# Altium PCB UVB LED Array.PcbDoc
Units mm, origin at the board's own origin, x right, y up, seen from the top; angles counter-clockwise.
Board outline 200 x 120 mm, 2 copper layers (Top Layer, Bottom Layer), stack 1.571 mm thick; 154 components, 153 nets, 494 pads, 0 vias.
Unrouted connection lines stored in the file: 155.
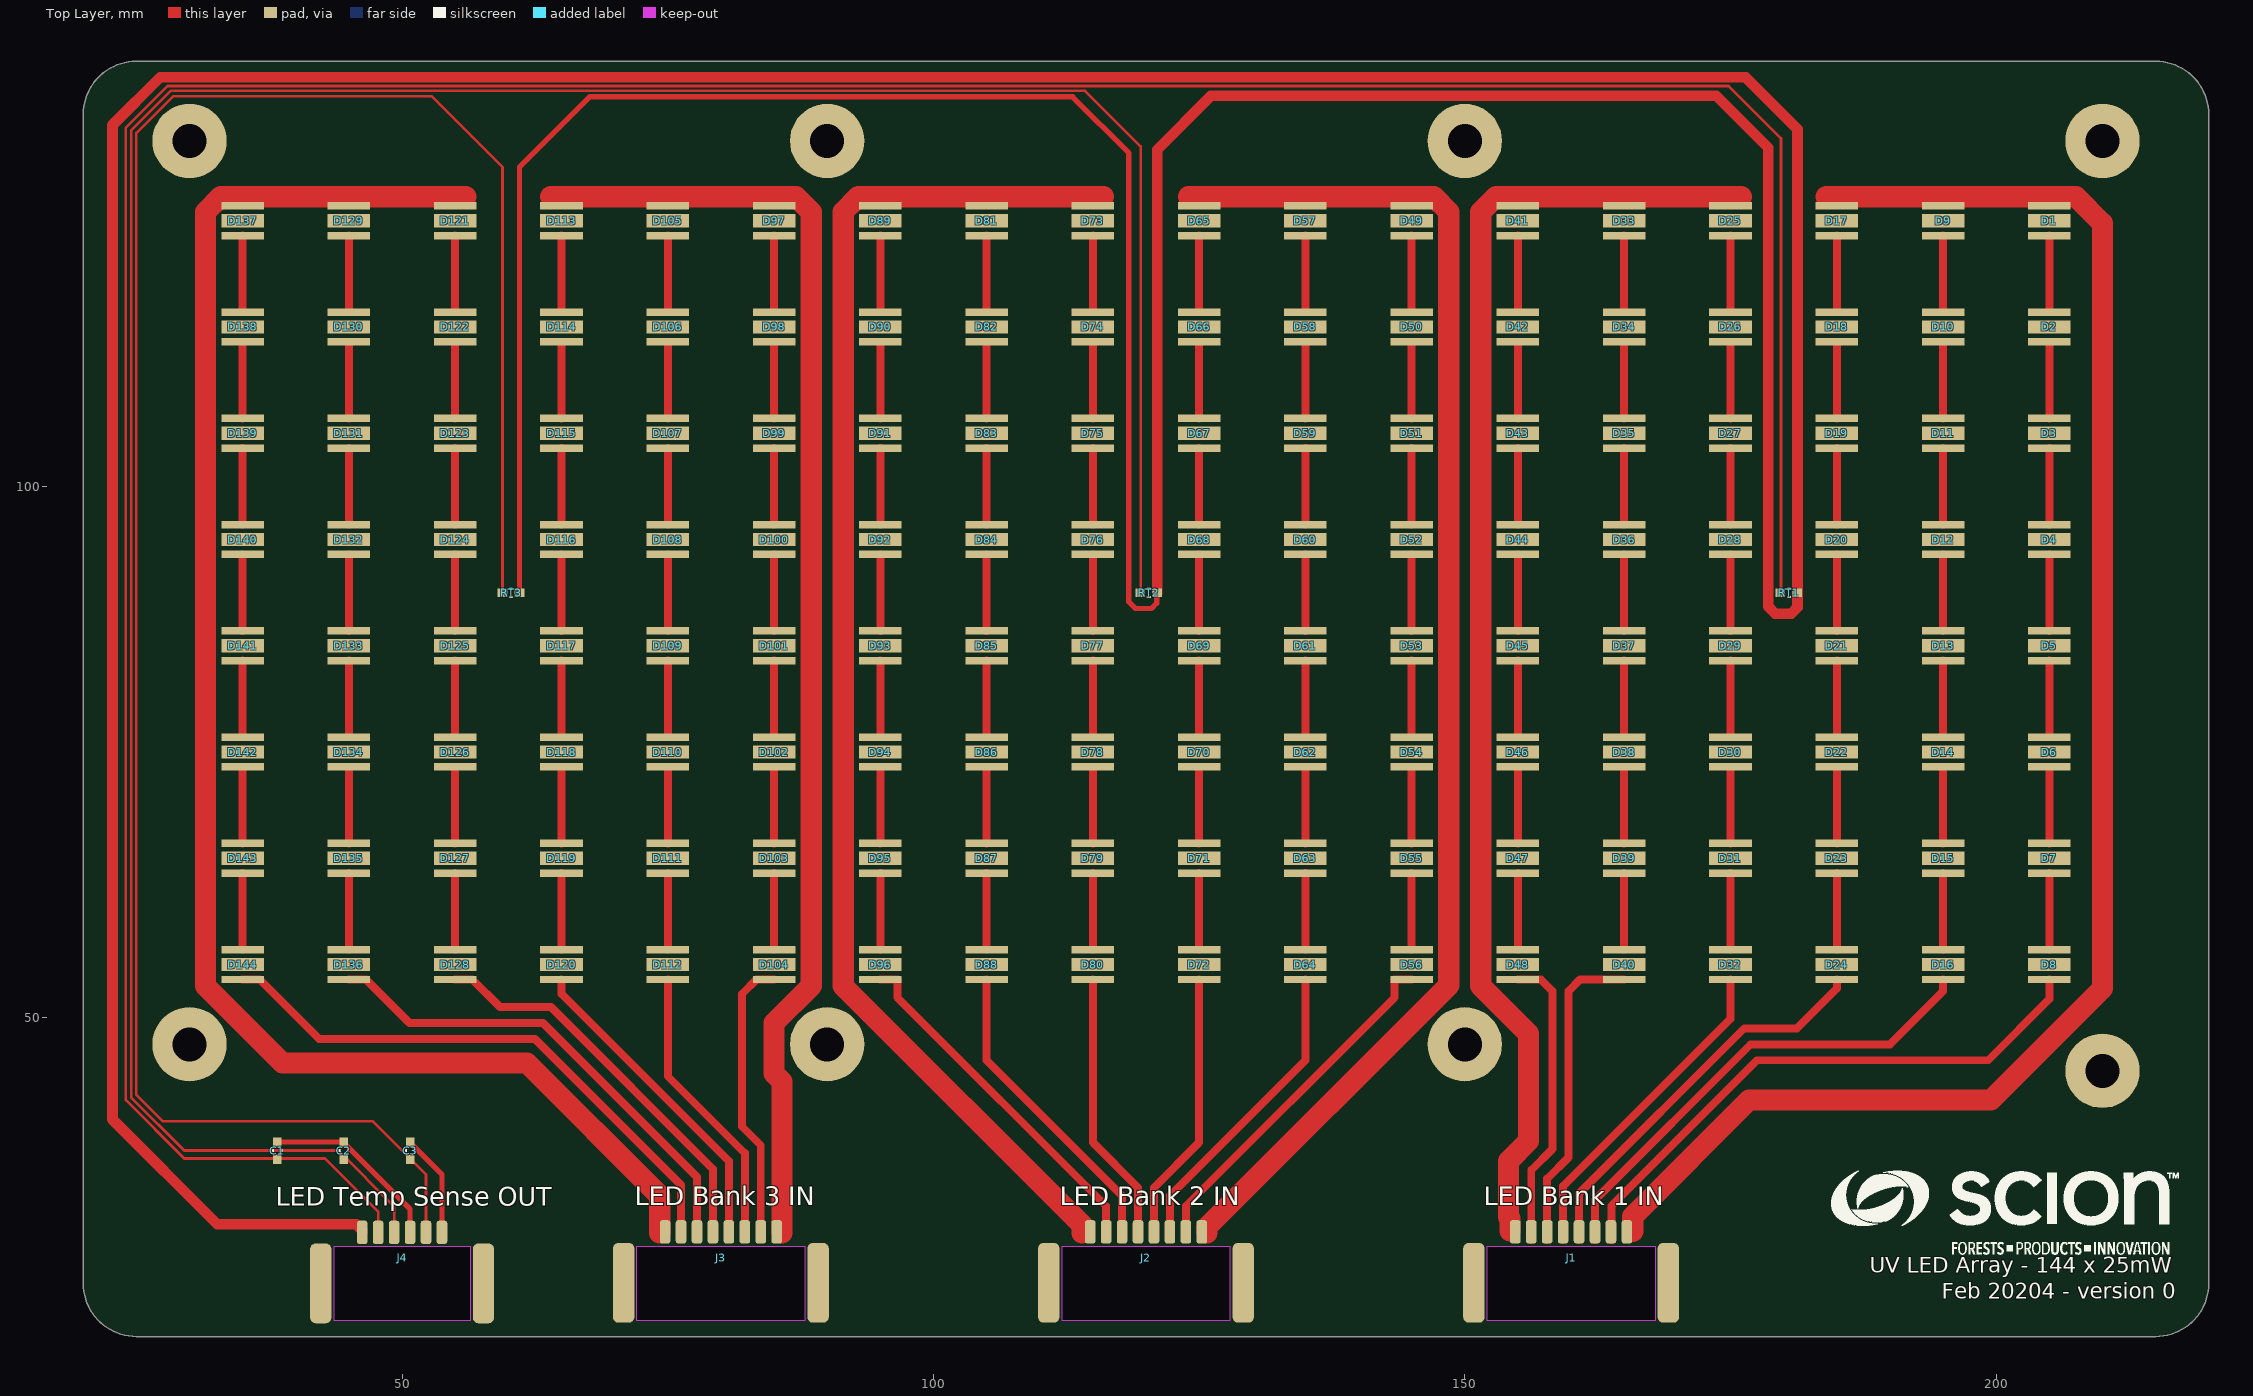
[diagram p0: Top Layer view]
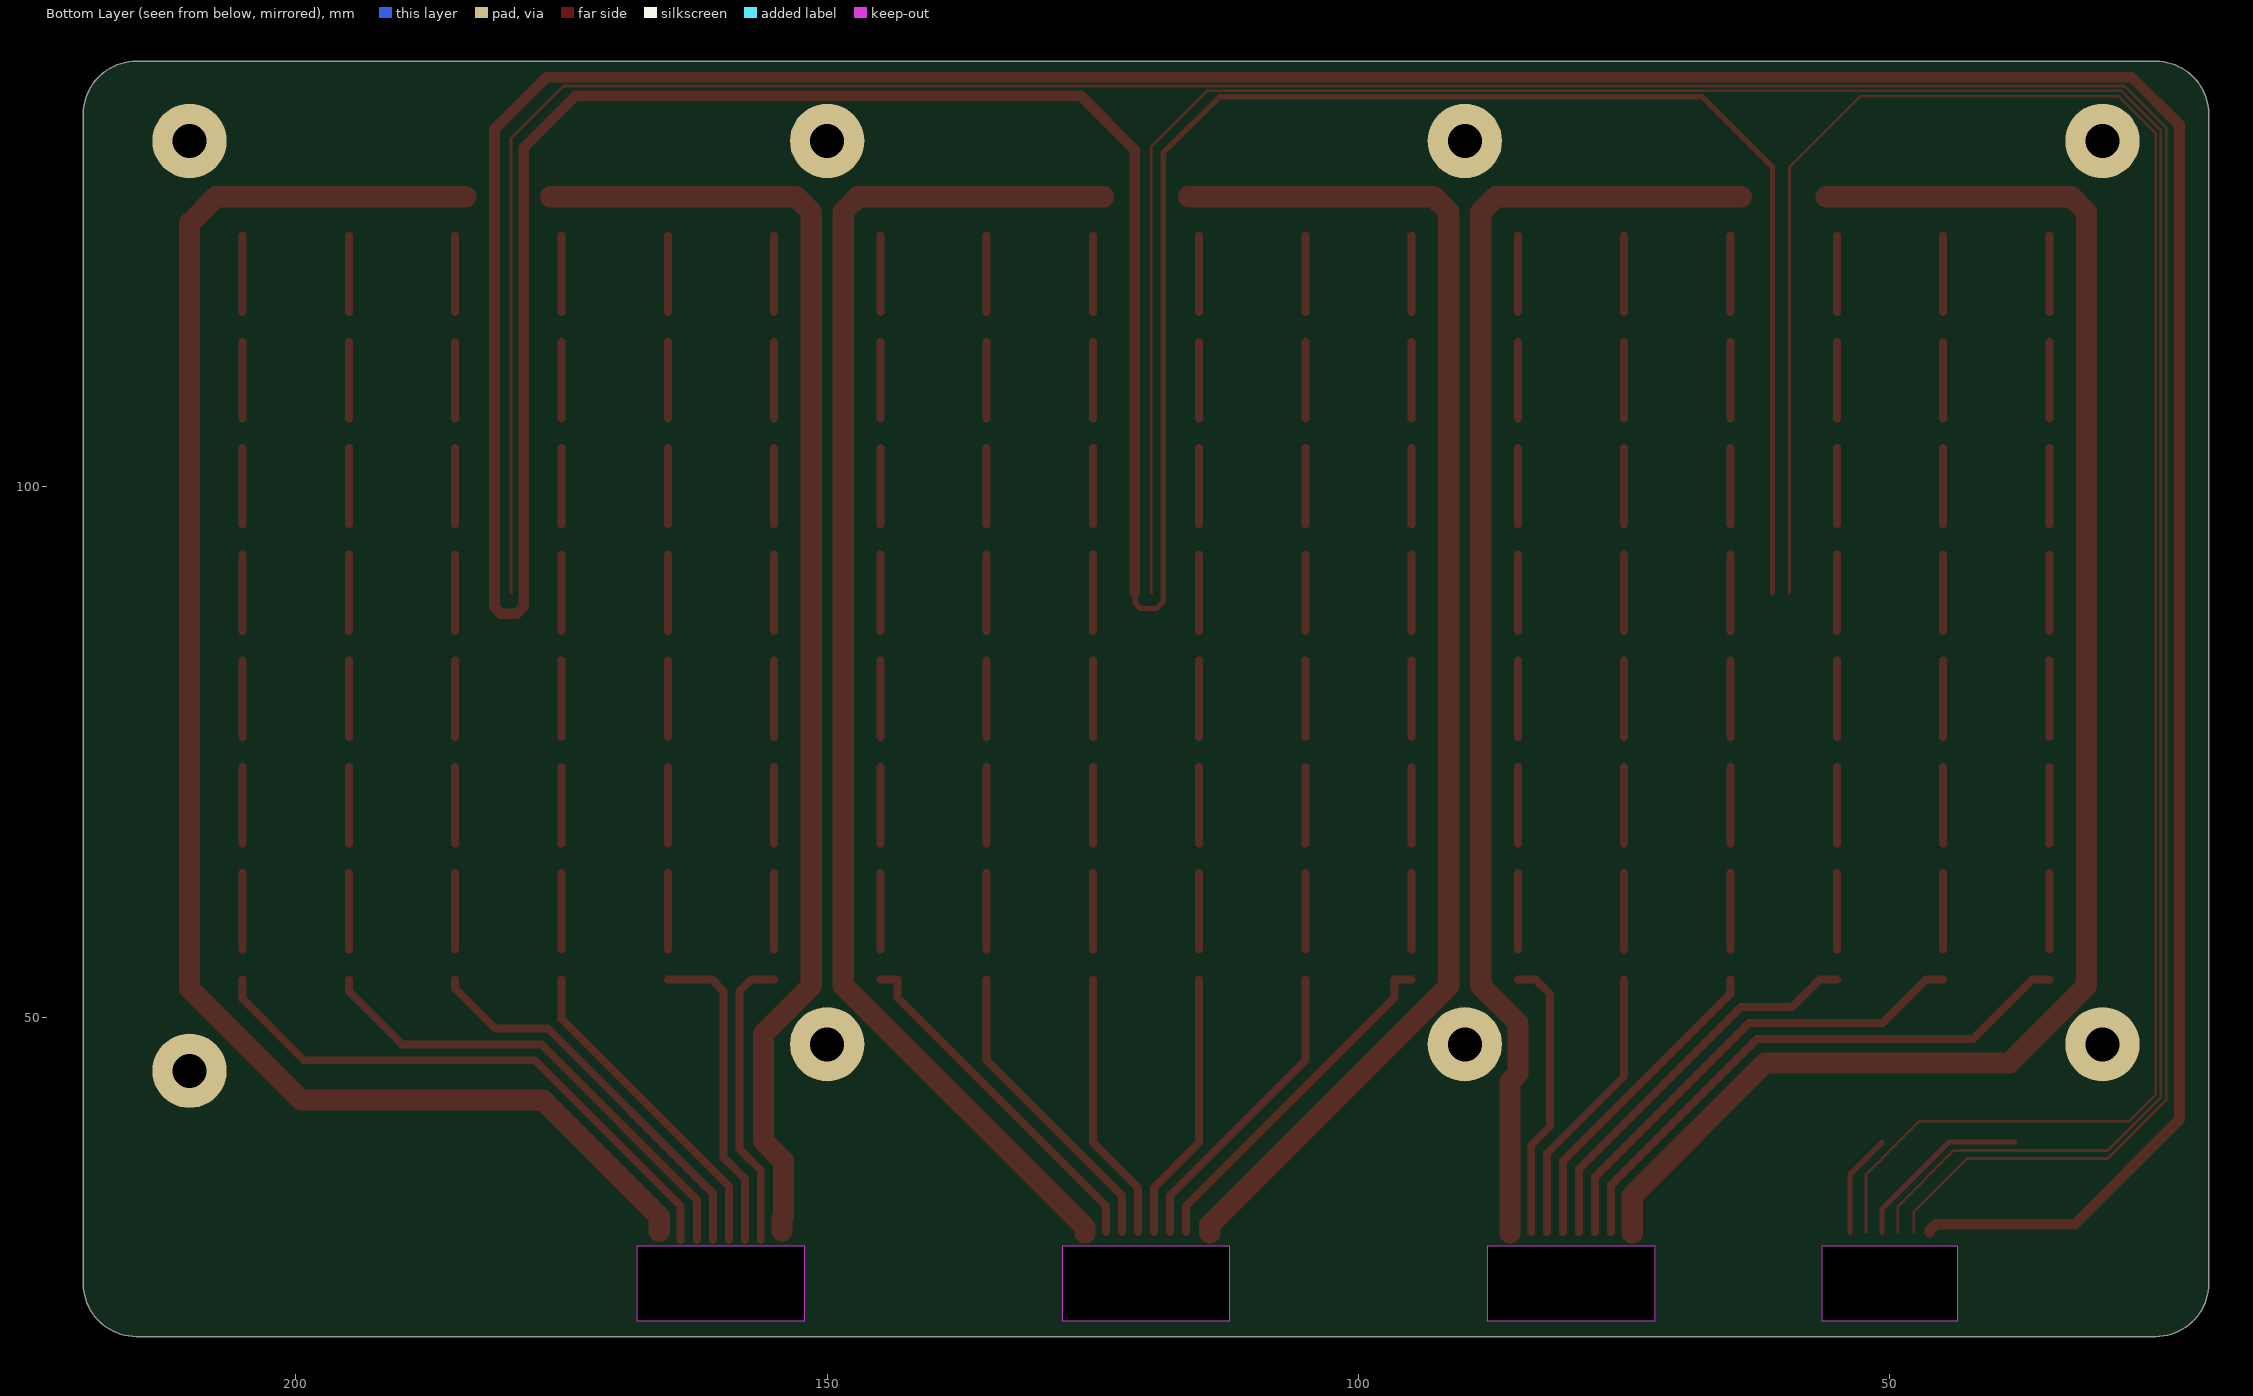
[diagram p1: Bottom Layer view, seen from below]
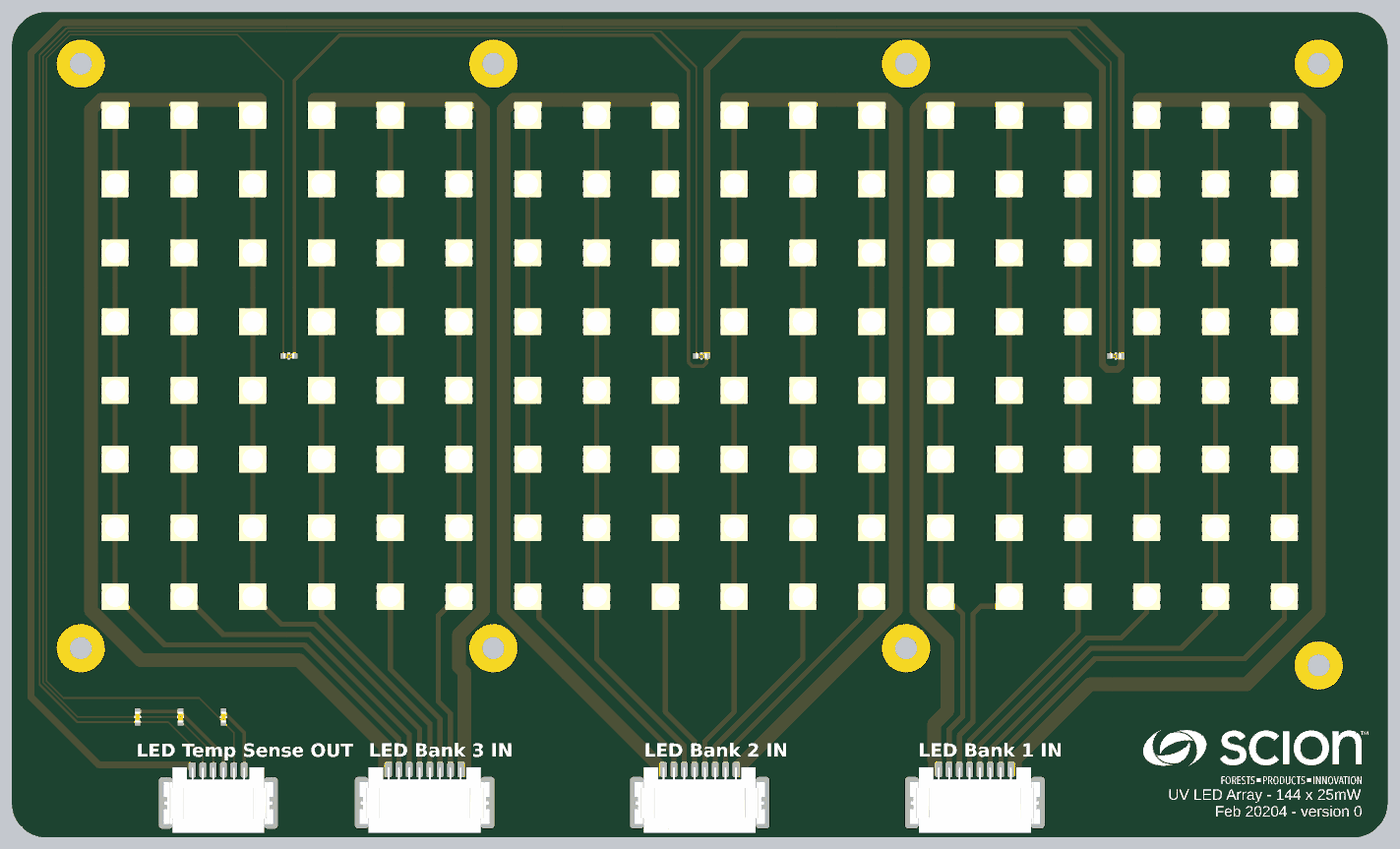
[diagram p2: 3D render of the assembled board from above, using the file's embedded part models]

## Layer stack, top to bottom
Top Solder: solder mask 0.0102, Solder Resist, Dk 3.5
Top Layer: signal copper 0.0356
Dielectric 1: dielectric 1.5, FR-4, Dk 4.8
Bottom Layer: signal copper 0.0356
Bottom Solder: solder mask 0.0102, Solder Resist, Dk 3.5

## Board outline
220,135 ccw(c215,135) 215,140 25,140 ccw(c25,135) 20,135 20,25 ccw(c25,25) 25,20 215,20 ccw(c215,25) 220,25
cut-out: 152.1,28.5 167.9,28.5 167.9,21.5 152.1,21.5
cut-out: 112.1,28.5 127.9,28.5 127.9,21.5 112.1,21.5
cut-out: 72.1,28.5 87.9,28.5 87.9,21.5 72.1,21.5
cut-out: 43.6,28.5 56.4,28.5 56.4,21.5 43.6,21.5

## Design rules (kind name [scope] priority, off if disabled: settings)
Clearance [All] p1: gap=0.2 ignorepadtopadclearanceinfootprint=FALSE
PolygonConnect "No relief connect" [All vs IsNamedPolygon('GND_L01_P000')] p1: connectstyle=Direct reliefconductorwidth=0 reliefentries=4 polygonreliefangle="90 Angle" airgapwidth=0
PolygonConnect [All] p2: connectstyle=Relief reliefconductorwidth=0.254 reliefentries=4 polygonreliefangle="90 Angle" airgapwidth=0.254
RoutingVias [All] p1: holewidth=0.711 width=1.27 viastyle="Through Hole" minholewidth=0.711 minwidth=1.27 maxholewidth=0.711 maxwidth=1.27
SolderMaskExpansion [All] p1: expansion=0.102 istentingtop=FALSE
Width [All] p1: maxlimit=10 minlimit=0.2 preferedwidth=1
30 further rules are at their usual default settings.

## Components (designator, comment, footprint, x,y, rotation, side; value= is the part's Value field where it differs from the comment)
C1 "Capacitor" 0603_CAP 38.25,37.5 r270 top value=1µF
C2 "Capacitor" 0603_CAP 44.5,37.5 r270 top value=1µF
C3 "Capacitor" 0603_CAP 50.75,37.5 r270 top value=1µF
D1 "3838UVB UV SMD LED" "3838UVB UV SMD LED-Footprint-1" 205,125 r270 top
D2 "3838UVB UV SMD LED" "3838UVB UV SMD LED-Footprint-1" 205,115 r270 top
D3 "3838UVB UV SMD LED" "3838UVB UV SMD LED-Footprint-1" 205,105 r270 top
D4 "3838UVB UV SMD LED" "3838UVB UV SMD LED-Footprint-1" 205,95 r270 top
D5 "3838UVB UV SMD LED" "3838UVB UV SMD LED-Footprint-1" 205,85 r270 top
D6 "3838UVB UV SMD LED" "3838UVB UV SMD LED-Footprint-1" 205,75 r270 top
D7 "3838UVB UV SMD LED" "3838UVB UV SMD LED-Footprint-1" 205,65 r270 top
D8 "3838UVB UV SMD LED" "3838UVB UV SMD LED-Footprint-1" 205,55 r270 top
D9 "3838UVB UV SMD LED" "3838UVB UV SMD LED-Footprint-1" 195,125 r270 top
D10 "3838UVB UV SMD LED" "3838UVB UV SMD LED-Footprint-1" 195,115 r270 top
D11 "3838UVB UV SMD LED" "3838UVB UV SMD LED-Footprint-1" 195,105 r270 top
D12 "3838UVB UV SMD LED" "3838UVB UV SMD LED-Footprint-1" 195,95 r270 top
D13 "3838UVB UV SMD LED" "3838UVB UV SMD LED-Footprint-1" 195,85 r270 top
D14 "3838UVB UV SMD LED" "3838UVB UV SMD LED-Footprint-1" 195,75 r270 top
D15 "3838UVB UV SMD LED" "3838UVB UV SMD LED-Footprint-1" 195,65 r270 top
D16 "3838UVB UV SMD LED" "3838UVB UV SMD LED-Footprint-1" 195,55 r270 top
D17 "3838UVB UV SMD LED" "3838UVB UV SMD LED-Footprint-1" 185,125 r270 top
D18 "3838UVB UV SMD LED" "3838UVB UV SMD LED-Footprint-1" 185,115 r270 top
D19 "3838UVB UV SMD LED" "3838UVB UV SMD LED-Footprint-1" 185,105 r270 top
D20 "3838UVB UV SMD LED" "3838UVB UV SMD LED-Footprint-1" 185,95 r270 top
D21 "3838UVB UV SMD LED" "3838UVB UV SMD LED-Footprint-1" 185,85 r270 top
D22 "3838UVB UV SMD LED" "3838UVB UV SMD LED-Footprint-1" 185,75 r270 top
D23 "3838UVB UV SMD LED" "3838UVB UV SMD LED-Footprint-1" 185,65 r270 top
D24 "3838UVB UV SMD LED" "3838UVB UV SMD LED-Footprint-1" 185,55 r270 top
D25 "3838UVB UV SMD LED" "3838UVB UV SMD LED-Footprint-1" 175,125 r270 top
D26 "3838UVB UV SMD LED" "3838UVB UV SMD LED-Footprint-1" 175,115 r270 top
D27 "3838UVB UV SMD LED" "3838UVB UV SMD LED-Footprint-1" 175,105 r270 top
D28 "3838UVB UV SMD LED" "3838UVB UV SMD LED-Footprint-1" 175,95 r270 top
D29 "3838UVB UV SMD LED" "3838UVB UV SMD LED-Footprint-1" 175,85 r270 top
D30 "3838UVB UV SMD LED" "3838UVB UV SMD LED-Footprint-1" 175,75 r270 top
D31 "3838UVB UV SMD LED" "3838UVB UV SMD LED-Footprint-1" 175,65 r270 top
D32 "3838UVB UV SMD LED" "3838UVB UV SMD LED-Footprint-1" 175,55 r270 top
D33 "3838UVB UV SMD LED" "3838UVB UV SMD LED-Footprint-1" 165,125 r270 top
D34 "3838UVB UV SMD LED" "3838UVB UV SMD LED-Footprint-1" 165,115 r270 top
D35 "3838UVB UV SMD LED" "3838UVB UV SMD LED-Footprint-1" 165,105 r270 top
D36 "3838UVB UV SMD LED" "3838UVB UV SMD LED-Footprint-1" 165,95 r270 top
D37 "3838UVB UV SMD LED" "3838UVB UV SMD LED-Footprint-1" 165,85 r270 top
D38 "3838UVB UV SMD LED" "3838UVB UV SMD LED-Footprint-1" 165,75 r270 top
D39 "3838UVB UV SMD LED" "3838UVB UV SMD LED-Footprint-1" 165,65 r270 top
D40 "3838UVB UV SMD LED" "3838UVB UV SMD LED-Footprint-1" 165,55 r270 top
D41 "3838UVB UV SMD LED" "3838UVB UV SMD LED-Footprint-1" 155,125 r270 top
D42 "3838UVB UV SMD LED" "3838UVB UV SMD LED-Footprint-1" 155,115 r270 top
D43 "3838UVB UV SMD LED" "3838UVB UV SMD LED-Footprint-1" 155,105 r270 top
D44 "3838UVB UV SMD LED" "3838UVB UV SMD LED-Footprint-1" 155,95 r270 top
D45 "3838UVB UV SMD LED" "3838UVB UV SMD LED-Footprint-1" 155,85 r270 top
D46 "3838UVB UV SMD LED" "3838UVB UV SMD LED-Footprint-1" 155,75 r270 top
D47 "3838UVB UV SMD LED" "3838UVB UV SMD LED-Footprint-1" 155,65 r270 top
D48 "3838UVB UV SMD LED" "3838UVB UV SMD LED-Footprint-1" 155,55 r270 top
D49 "3838UVB UV SMD LED" "3838UVB UV SMD LED-Footprint-1" 145,125 r270 top
D50 "3838UVB UV SMD LED" "3838UVB UV SMD LED-Footprint-1" 145,115 r270 top
D51 "3838UVB UV SMD LED" "3838UVB UV SMD LED-Footprint-1" 145,105 r270 top
D52 "3838UVB UV SMD LED" "3838UVB UV SMD LED-Footprint-1" 145,95 r270 top
D53 "3838UVB UV SMD LED" "3838UVB UV SMD LED-Footprint-1" 145,85 r270 top
D54 "3838UVB UV SMD LED" "3838UVB UV SMD LED-Footprint-1" 145,75 r270 top
D55 "3838UVB UV SMD LED" "3838UVB UV SMD LED-Footprint-1" 145,65 r270 top
D56 "3838UVB UV SMD LED" "3838UVB UV SMD LED-Footprint-1" 145,55 r270 top
D57 "3838UVB UV SMD LED" "3838UVB UV SMD LED-Footprint-1" 135,125 r270 top
D58 "3838UVB UV SMD LED" "3838UVB UV SMD LED-Footprint-1" 135,115 r270 top
D59 "3838UVB UV SMD LED" "3838UVB UV SMD LED-Footprint-1" 135,105 r270 top
D60 "3838UVB UV SMD LED" "3838UVB UV SMD LED-Footprint-1" 135,95 r270 top
D61 "3838UVB UV SMD LED" "3838UVB UV SMD LED-Footprint-1" 135,85 r270 top
D62 "3838UVB UV SMD LED" "3838UVB UV SMD LED-Footprint-1" 135,75 r270 top
D63 "3838UVB UV SMD LED" "3838UVB UV SMD LED-Footprint-1" 135,65 r270 top
D64 "3838UVB UV SMD LED" "3838UVB UV SMD LED-Footprint-1" 135,55 r270 top
D65 "3838UVB UV SMD LED" "3838UVB UV SMD LED-Footprint-1" 125,125 r270 top
D66 "3838UVB UV SMD LED" "3838UVB UV SMD LED-Footprint-1" 125,115 r270 top
D67 "3838UVB UV SMD LED" "3838UVB UV SMD LED-Footprint-1" 125,105 r270 top
D68 "3838UVB UV SMD LED" "3838UVB UV SMD LED-Footprint-1" 125,95 r270 top
D69 "3838UVB UV SMD LED" "3838UVB UV SMD LED-Footprint-1" 125,85 r270 top
D70 "3838UVB UV SMD LED" "3838UVB UV SMD LED-Footprint-1" 125,75 r270 top
D71 "3838UVB UV SMD LED" "3838UVB UV SMD LED-Footprint-1" 125,65 r270 top
D72 "3838UVB UV SMD LED" "3838UVB UV SMD LED-Footprint-1" 125,55 r270 top
D73 "3838UVB UV SMD LED" "3838UVB UV SMD LED-Footprint-1" 115,125 r270 top
D74 "3838UVB UV SMD LED" "3838UVB UV SMD LED-Footprint-1" 115,115 r270 top
D75 "3838UVB UV SMD LED" "3838UVB UV SMD LED-Footprint-1" 115,105 r270 top
D76 "3838UVB UV SMD LED" "3838UVB UV SMD LED-Footprint-1" 115,95 r270 top
D77 "3838UVB UV SMD LED" "3838UVB UV SMD LED-Footprint-1" 115,85 r270 top
D78 "3838UVB UV SMD LED" "3838UVB UV SMD LED-Footprint-1" 115,75 r270 top
D79 "3838UVB UV SMD LED" "3838UVB UV SMD LED-Footprint-1" 115,65 r270 top
D80 "3838UVB UV SMD LED" "3838UVB UV SMD LED-Footprint-1" 115,55 r270 top
D81 "3838UVB UV SMD LED" "3838UVB UV SMD LED-Footprint-1" 105,125 r270 top
D82 "3838UVB UV SMD LED" "3838UVB UV SMD LED-Footprint-1" 105,115 r270 top
D83 "3838UVB UV SMD LED" "3838UVB UV SMD LED-Footprint-1" 105,105 r270 top
D84 "3838UVB UV SMD LED" "3838UVB UV SMD LED-Footprint-1" 105,95 r270 top
D85 "3838UVB UV SMD LED" "3838UVB UV SMD LED-Footprint-1" 105,85 r270 top
D86 "3838UVB UV SMD LED" "3838UVB UV SMD LED-Footprint-1" 105,75 r270 top
D87 "3838UVB UV SMD LED" "3838UVB UV SMD LED-Footprint-1" 105,65 r270 top
D88 "3838UVB UV SMD LED" "3838UVB UV SMD LED-Footprint-1" 105,55 r270 top
D89 "3838UVB UV SMD LED" "3838UVB UV SMD LED-Footprint-1" 95,125 r270 top
D90 "3838UVB UV SMD LED" "3838UVB UV SMD LED-Footprint-1" 95,115 r270 top
D91 "3838UVB UV SMD LED" "3838UVB UV SMD LED-Footprint-1" 95,105 r270 top
D92 "3838UVB UV SMD LED" "3838UVB UV SMD LED-Footprint-1" 95,95 r270 top
D93 "3838UVB UV SMD LED" "3838UVB UV SMD LED-Footprint-1" 95,85 r270 top
D94 "3838UVB UV SMD LED" "3838UVB UV SMD LED-Footprint-1" 95,75 r270 top
D95 "3838UVB UV SMD LED" "3838UVB UV SMD LED-Footprint-1" 95,65 r270 top
D96 "3838UVB UV SMD LED" "3838UVB UV SMD LED-Footprint-1" 95,55 r270 top
D97 "3838UVB UV SMD LED" "3838UVB UV SMD LED-Footprint-1" 85,125 r270 top
D98 "3838UVB UV SMD LED" "3838UVB UV SMD LED-Footprint-1" 85,115 r270 top
D99 "3838UVB UV SMD LED" "3838UVB UV SMD LED-Footprint-1" 85,105 r270 top
D100 "3838UVB UV SMD LED" "3838UVB UV SMD LED-Footprint-1" 85,95 r270 top
D101 "3838UVB UV SMD LED" "3838UVB UV SMD LED-Footprint-1" 85,85 r270 top
D102 "3838UVB UV SMD LED" "3838UVB UV SMD LED-Footprint-1" 85,75 r270 top
D103 "3838UVB UV SMD LED" "3838UVB UV SMD LED-Footprint-1" 85,65 r270 top
D104 "3838UVB UV SMD LED" "3838UVB UV SMD LED-Footprint-1" 85,55 r270 top
D105 "3838UVB UV SMD LED" "3838UVB UV SMD LED-Footprint-1" 75,125 r270 top
D106 "3838UVB UV SMD LED" "3838UVB UV SMD LED-Footprint-1" 75,115 r270 top
D107 "3838UVB UV SMD LED" "3838UVB UV SMD LED-Footprint-1" 75,105 r270 top
D108 "3838UVB UV SMD LED" "3838UVB UV SMD LED-Footprint-1" 75,95 r270 top
D109 "3838UVB UV SMD LED" "3838UVB UV SMD LED-Footprint-1" 75,85 r270 top
D110 "3838UVB UV SMD LED" "3838UVB UV SMD LED-Footprint-1" 75,75 r270 top
D111 "3838UVB UV SMD LED" "3838UVB UV SMD LED-Footprint-1" 75,65 r270 top
D112 "3838UVB UV SMD LED" "3838UVB UV SMD LED-Footprint-1" 75,55 r270 top
D113 "3838UVB UV SMD LED" "3838UVB UV SMD LED-Footprint-1" 65,125 r270 top
D114 "3838UVB UV SMD LED" "3838UVB UV SMD LED-Footprint-1" 65,115 r270 top
D115 "3838UVB UV SMD LED" "3838UVB UV SMD LED-Footprint-1" 65,105 r270 top
D116 "3838UVB UV SMD LED" "3838UVB UV SMD LED-Footprint-1" 65,95 r270 top
D117 "3838UVB UV SMD LED" "3838UVB UV SMD LED-Footprint-1" 65,85 r270 top
D118 "3838UVB UV SMD LED" "3838UVB UV SMD LED-Footprint-1" 65,75 r270 top
D119 "3838UVB UV SMD LED" "3838UVB UV SMD LED-Footprint-1" 65,65 r270 top
D120 "3838UVB UV SMD LED" "3838UVB UV SMD LED-Footprint-1" 65,55 r270 top
D121 "3838UVB UV SMD LED" "3838UVB UV SMD LED-Footprint-1" 55,125 r270 top
D122 "3838UVB UV SMD LED" "3838UVB UV SMD LED-Footprint-1" 55,115 r270 top
D123 "3838UVB UV SMD LED" "3838UVB UV SMD LED-Footprint-1" 55,105 r270 top
D124 "3838UVB UV SMD LED" "3838UVB UV SMD LED-Footprint-1" 55,95 r270 top
D125 "3838UVB UV SMD LED" "3838UVB UV SMD LED-Footprint-1" 55,85 r270 top
D126 "3838UVB UV SMD LED" "3838UVB UV SMD LED-Footprint-1" 55,75 r270 top
D127 "3838UVB UV SMD LED" "3838UVB UV SMD LED-Footprint-1" 55,65 r270 top
D128 "3838UVB UV SMD LED" "3838UVB UV SMD LED-Footprint-1" 55,55 r270 top
D129 "3838UVB UV SMD LED" "3838UVB UV SMD LED-Footprint-1" 45,125 r270 top
D130 "3838UVB UV SMD LED" "3838UVB UV SMD LED-Footprint-1" 45,115 r270 top
D131 "3838UVB UV SMD LED" "3838UVB UV SMD LED-Footprint-1" 45,105 r270 top
D132 "3838UVB UV SMD LED" "3838UVB UV SMD LED-Footprint-1" 45,95 r270 top
D133 "3838UVB UV SMD LED" "3838UVB UV SMD LED-Footprint-1" 45,85 r270 top
D134 "3838UVB UV SMD LED" "3838UVB UV SMD LED-Footprint-1" 45,75 r270 top
D135 "3838UVB UV SMD LED" "3838UVB UV SMD LED-Footprint-1" 45,65 r270 top
D136 "3838UVB UV SMD LED" "3838UVB UV SMD LED-Footprint-1" 45,55 r270 top
D137 "3838UVB UV SMD LED" "3838UVB UV SMD LED-Footprint-1" 35,125 r270 top
D138 "3838UVB UV SMD LED" "3838UVB UV SMD LED-Footprint-1" 35,115 r270 top
D139 "3838UVB UV SMD LED" "3838UVB UV SMD LED-Footprint-1" 35,105 r270 top
D140 "3838UVB UV SMD LED" "3838UVB UV SMD LED-Footprint-1" 35,95 r270 top
D141 "3838UVB UV SMD LED" "3838UVB UV SMD LED-Footprint-1" 35,85 r270 top
D142 "3838UVB UV SMD LED" "3838UVB UV SMD LED-Footprint-1" 35,75 r270 top
D143 "3838UVB UV SMD LED" "3838UVB UV SMD LED-Footprint-1" 35,65 r270 top
D144 "3838UVB UV SMD LED" "3838UVB UV SMD LED-Footprint-1" 35,55 r270 top
J1 "LED bank 1" "8P Clik-MATE 1.5mm INVERTED" 154.75,29.85 r180 top
J2 "LED bank 2" "8P Clik-MATE 1.5mm INVERTED" 114.75,29.85 r180 top
J3 "LED bank 3" "8P Clik-MATE 1.5mm INVERTED" 74.75,29.85 r180 top
J4 "Thermistors" "6P Clik-MATE 1.5mm INVERTED" 46.25,29.8 r180 top
RT1 "NTC" 0603_THERM 180.5,90 r180 top value=10K
RT2 "NTC" 0603_THERM 120.25,90 r180 top value=10K
RT3 "NTC" 0603_THERM 60.25,90 r180 top value=10K

## Footprints (in the part's own frame and the unit in brackets; to place one, negate y for a bottom-side part, rotate by r counter-clockwise, add the part's x,y. Pads: shape width x height; smd on the part's side, far side on the other; paste and mask are expansions set on the pad)
"6P Clik-MATE 1.5mm INVERTED" [mm]
  rrect50% 1x2.2 smd: 1(0,0) 2(-1.5,0) 3(-3,0) 4(-4.5,0) 5(-6,0) 6(-7.5,0)
  rrect50% 2x7.5 smd: ""(-11.4,4.8) ""(3.9,4.8)
  rrect50% 0x0 hole 7 square unplated: ""(-3.75,4.8)
  body extent -11.7,-0.37 4.2,9.13, height 2
"8P Clik-MATE 1.5mm INVERTED" [mm]
  rrect50% 1x2.2 smd: 1(0,0) 2(-1.5,0) 3(-3,0) 4(-4.5,0) 5(-6,0) 6(-7.5,0) 7(-9,0) 8(-10.5,0)
  rrect50% 2x7.5 smd: ""(-14.4,4.8) ""(3.9,4.8)
  rrect50% 0x0 hole 7 square unplated: ""(-5.25,4.85)
  body extent -14.7,-0.35 4.2,9.15, height 2
0603_CAP [mm] "SMD Capacitor 0603"
  rect 0.9x0.8 smd: 1(-0.8,0) 2(0.8,0)
  silkscreen extent -0.1,-0.4 0.1,0.4, body extent -0.8,-0.4 0.8,0.4, height 0.8
0603_THERM [mm] "SMD Thermistor 0603"
  rect 0.9x0.8 smd: 1(-0.8,0) 2(0.8,0)
  silkscreen extent -0.1,-0.4 0.1,0.4, body extent -0.8,-0.4 0.8,0.4, height 0.8
"3838UVB UV SMD LED-Footprint-1" [mm]
  rect 0.7x4 smd: A(-1.4,0) K(1.4,0)
  rect 1.25x4 smd: TP(0,0)
  body extent -1.95,-1.95 1.95,1.95, height 1.4

## Part data
C1 C2 C3: library part CMP-001-00172-2, "SMD Capacitor", Component Type=Standard, Design Item ID=Capacitor, Pins=2, Source=Discrete.SchLib
D1 D2 D3 D4 D5 D6 D7 D8 D9 D10 D11 D12 D13 D14 D15 D16 D17 D18 D19 D20 D21 D22 D23 D24 D25 D26 D27 D28 D29 D30 D31 D32 D33 D34 D35 D36 D37 D38 D39 D40 D41 D42 D43 D44 D45 D46 D47 D48 D49 D50 D51 D52 D53 D54 D55 D56 D57 D58 D59 D60 D61 D62 D63 D64 D65 D66 D67 D68 D69 D70 D71 D72 D73 D74 D75 D76 D77 D78 D79 D80 D81 D82 D83 D84 D85 D86 D87 D88 D89 D90 D91 D92 D93 D94 D95 D96 D97 D98 D99 D100 D101 D102 D103 D104 D105 D106 D107 D108 D109 D110 D111 D112 D113 D114 D115 D116 D117 D118 D119 D120 D121 D122 D123 D124 D125 D126 D127 D128 D129 D130 D131 D132 D133 D134 D135 D136 D137 D138 D139 D140 D141 D142 D143 D144: library part CMP-007-00000-1
J1 J2 J3: library part CMP-002-00183-2, "8 Pin Connector", Component Type=Standard, Design Item ID=8_Pin, Pin Count=8, Pins=8, Source=Connectors.SchLib
J4: library part CMP-002-00180-3, "6 Pin Connector", Component Type=Standard, Design Item ID=6_Pin, Pin Count=6, Pins=6, Source=Connectors.SchLib
RT1 RT2 RT3: library part CMP-079-000106-1, "Thermistor", Max Power=100mW, B-Constant=3930, Component Type=Standard, Design Item ID=Thermistor, Pin Count=2, Source=Discrete.SchLib

## Free pads (board coordinates)
  round 7 hole 3.2 unplated: ""(30,47.5) ""(30,132.5) ""(90,47.5) ""(90,132.5) ""(150,47.5) ""(150,132.5) ""(210,45) ""(210,132.5)

## Nets (pads, with @x,y where several pads share a name; then routed paths per layer and width w, separated by ;. In a path a pad name is that pad's centre, name@x,y a point inside that pad or via, vN(x,y) a via of type N, cw(c..) or ccw(c..) an arc to the next point about the centre after c; other vN are vias at no path point)
+3V3: J4.1 RT1.1 RT2.1 RT3.1 | length 627.4
  Top Layer w0.5: RT3.1 61.05,130.05 67.65,136.65 113.1,136.65 118.389,131.361 118.389,89.111 119,88.5 120.5,88.5 121,89 121,89.95 RT2.1
  Top Layer w1: J4.1 46.25,29.999 45.988,30.261 ccw(c45.281,29.554) 45.987,30.263 45.695,30.554 32.614,30.554 22.75,40.418 22.75,134 27.25,138.5 176.418,138.5 181.3,133.618 181.3,88.615 180.714,88.029 179.221,88.029 178.55,88.7 178.55,131.868 173.668,136.75 149.759,136.75 126.11,136.75 121.05,131.69 RT2.1
+CC1: D1.A D9.A D17.A D25.A D33.A D41.A J1.1 J1.8 | length 277.2
  Top Layer w2: J1.1@154.25,29.95 154.25,31.096 154.1,31.246 154.1,36.5 156,38.4 156,48.5 151.5,53 151.5,125.822 152.928,127.25 176,127.25 ; 165.8,29.9 165.8,31.3 176.75,42.25 199.5,42.25 210,52.75 210,124.75 207.5,127.25 205,127.25 195,127.25 184,127.25
+CC2: D49.A D57.A D65.A D73.A D81.A D89.A J2.1 J2.8 | length 261.1
  Top Layer w2: 114,29.75 114,30.5 91.5,53 91.5,125.822 92.928,127.25 116,127.25 ; 124,127.25 147.072,127.25 148.5,125.822 148.5,53.053 125.75,30.303 125.75,29.75
+CC3: D97.A D105.A D113.A D121.A D129.A D137.A J3.1 J3.8 | length 275.3
  Top Layer w2: 56,127.25 32.928,127.25 31.5,125.822 31.5,53 38.75,45.75 61.75,45.75 74.25,33.25 74.25,29.75 ; 64,127.25 87.072,127.25 88.5,125.822 88.5,53 85,49.5 85,44.75 85.75,44 85.75,29.75
D_GND: C1.1 C2.1 C3.1 J4.4 J4.6 | length 27.1
  Top Layer w0.5: C1.1 44.45,38.3 50.75,32 J4.4 ; C3.1 50.75,38.25 53.75,35.25 J4.6
GND: D1.TP D2.TP D3.TP D4.TP D5.TP D6.TP D7.TP D8.TP D9.TP D10.TP D11.TP D12.TP D13.TP D14.TP D15.TP D16.TP D17.TP D18.TP D19.TP D20.TP D21.TP D22.TP D23.TP D24.TP D25.TP D26.TP D27.TP D28.TP D29.TP D30.TP D31.TP D32.TP D33.TP D34.TP D35.TP D36.TP D37.TP D38.TP D39.TP D40.TP D41.TP D42.TP D43.TP D44.TP D45.TP D46.TP D47.TP D48.TP D49.TP D50.TP D51.TP D52.TP D53.TP D54.TP D55.TP D56.TP D57.TP D58.TP D59.TP D60.TP D61.TP D62.TP D63.TP D64.TP D65.TP D66.TP D67.TP D68.TP D69.TP D70.TP D71.TP D72.TP D73.TP D74.TP D75.TP D76.TP D77.TP D78.TP D79.TP D80.TP D81.TP D82.TP D83.TP D84.TP D85.TP D86.TP D87.TP D88.TP D89.TP D90.TP D91.TP D92.TP D93.TP D94.TP D95.TP D96.TP D97.TP D98.TP D99.TP D100.TP D101.TP D102.TP D103.TP D104.TP D105.TP D106.TP D107.TP D108.TP D109.TP D110.TP D111.TP D112.TP D113.TP D114.TP D115.TP D116.TP D117.TP D118.TP D119.TP D120.TP D121.TP D122.TP D123.TP D124.TP D125.TP D126.TP D127.TP D128.TP D129.TP D130.TP D131.TP D132.TP D133.TP D134.TP D135.TP D136.TP D137.TP D138.TP D139.TP D140.TP D141.TP D142.TP D143.TP D144.TP pad.
NetD1_K: D1.K D2.A | length 7.2
  Top Layer w0.75: D2.A D1.K
NetD2_K: D2.K D3.A | length 7.2
  Top Layer w0.75: D3.A D2.K
NetD3_K: D3.K D4.A | length 7.2
  Top Layer w0.75: D4.A D3.K
NetD4_K: D4.K D5.A | length 7.2
  Top Layer w0.75: D5.A D4.K
NetD5_K: D5.K D6.A | length 7.2
  Top Layer w0.75: D6.A D5.K
NetD6_K: D6.K D7.A | length 7.2
  Top Layer w0.75: D7.A D6.K
NetD7_K: D7.K D8.A | length 7.2
  Top Layer w0.75: D8.A D7.K
NetD8_K: D8.K J1.7 | length 54.3
  Top Layer w0.75: J1.7@163.8,29.103 163.8,32.3 177.5,46 199.25,46 205,51.75 D8.K
NetD9_K: D9.K D10.A | length 7.2
  Top Layer w0.75: D10.A D9.K
NetD10_K: D10.K D11.A | length 7.2
  Top Layer w0.75: D11.A D10.K
NetD11_K: D11.K D12.A | length 7.2
  Top Layer w0.75: D12.A D11.K
NetD12_K: D12.K D13.A | length 7.2
  Top Layer w0.75: D13.A D12.K
NetD13_K: D13.K D14.A | length 7.2
  Top Layer w0.75: D14.A D13.K
NetD14_K: D14.K D15.A | length 7.2
  Top Layer w0.75: D15.A D14.K
NetD15_K: D15.K D16.A | length 7.2
  Top Layer w0.75: D16.A D15.K
NetD16_K: D16.K J1.6 | length 45.8
  Top Layer w0.75: J1.6@162.25,29.075 162.25,32.85 176.9,47.5 190,47.5 195,52.5 D16.K
NetD17_K: D17.K D18.A | length 7.2
  Top Layer w0.75: D18.A D17.K
NetD18_K: D18.K D19.A | length 7.2
  Top Layer w0.75: D19.A D18.K
NetD19_K: D19.K D20.A | length 7.2
  Top Layer w0.75: D20.A D19.K
NetD20_K: D20.K D21.A | length 7.2
  Top Layer w0.75: D21.A D20.K
NetD21_K: D21.K D22.A | length 7.2
  Top Layer w0.75: D22.A D21.K
NetD22_K: D22.K D23.A | length 7.2
  Top Layer w0.75: D23.A D22.K
NetD23_K: D23.K D24.A | length 7.2
  Top Layer w0.75: D24.A D23.K
NetD24_K: D24.K J1.5 | length 37.5
  Top Layer w0.75: J1.5@160.75,29.075 160.75,33.45 176.3,49 181.25,49 185,52.75 D24.K
NetD25_K: D25.K D26.A | length 7.2
  Top Layer w0.75: D26.A D25.K
NetD26_K: D26.K D27.A | length 7.2
  Top Layer w0.75: D27.A D26.K
NetD27_K: D27.K D28.A | length 7.2
  Top Layer w0.75: D28.A D27.K
NetD28_K: D28.K D29.A | length 7.2
  Top Layer w0.75: D29.A D28.K
NetD29_K: D29.K D30.A | length 7.2
  Top Layer w0.75: D30.A D29.K
NetD30_K: D30.K D31.A | length 7.2
  Top Layer w0.75: D31.A D30.K
NetD31_K: D31.K D32.A | length 7.2
  Top Layer w0.75: D32.A D31.K
NetD32_K: D32.K J1.4 | length 31
  Top Layer w0.75: J1.4@159.25,29.075 159.25,34.15 175,49.9 D32.K
NetD33_K: D33.K D34.A | length 7.2
  Top Layer w0.75: D34.A D33.K
NetD34_K: D34.K D35.A | length 7.2
  Top Layer w0.75: D35.A D34.K
NetD35_K: D35.K D36.A | length 7.2
  Top Layer w0.75: D36.A D35.K
NetD36_K: D36.K D37.A | length 7.2
  Top Layer w0.75: D37.A D36.K
NetD37_K: D37.K D38.A | length 7.2
  Top Layer w0.75: D38.A D37.K
NetD38_K: D38.K D39.A | length 7.2
  Top Layer w0.75: D39.A D38.K
NetD39_K: D39.K D40.A | length 7.2
  Top Layer w0.75: D40.A D39.K
NetD40_K: D40.K J1.3 | length 30
  Top Layer w0.75: J1.3@157.75,29.075 157.75,34.85 159.75,36.85 159.75,52.5 160.85,53.6 D40.K
NetD41_K: D41.K D42.A | length 7.2
  Top Layer w0.75: D42.A D41.K
NetD42_K: D42.K D43.A | length 7.2
  Top Layer w0.75: D43.A D42.K
NetD43_K: D43.K D44.A | length 7.2
  Top Layer w0.75: D44.A D43.K
NetD44_K: D44.K D45.A | length 7.2
  Top Layer w0.75: D45.A D44.K
NetD45_K: D45.K D46.A | length 7.2
  Top Layer w0.75: D46.A D45.K
NetD46_K: D46.K D47.A | length 7.2
  Top Layer w0.75: D47.A D46.K
NetD47_K: D47.K D48.A | length 7.2
  Top Layer w0.75: D48.A D47.K
NetD48_K: D48.K J1.2 | length 28
  Top Layer w0.75: D48.K 157.15,53.6 158.25,52.5 158.25,37.65 156.25,35.65 J1.2@156.25,29.075
NetD49_K: D49.K D50.A | length 7.2
  Top Layer w0.75: D50.A D49.K
NetD50_K: D50.K D51.A | length 7.2
  Top Layer w0.75: D51.A D50.K
NetD51_K: D51.K D52.A | length 7.2
  Top Layer w0.75: D52.A D51.K
NetD52_K: D52.K D53.A | length 7.2
  Top Layer w0.75: D53.A D52.K
NetD53_K: D53.K D54.A | length 7.2
  Top Layer w0.75: D54.A D53.K
NetD54_K: D54.K D55.A | length 7.2
  Top Layer w0.75: D55.A D54.K
NetD55_K: D55.K D56.A | length 7.2
  Top Layer w0.75: D56.A D55.K
NetD56_K: D56.K J2.7 | length 33.5
  Top Layer w0.75: J2.7 123.75,32.263 143.375,51.888 143.375,53.575 143.4,53.6 D56.K
NetD57_K: D57.K D58.A | length 7.2
  Top Layer w0.75: D58.A D57.K
NetD58_K: D58.K D59.A | length 7.2
  Top Layer w0.75: D59.A D58.K
NetD59_K: D59.K D60.A | length 7.2
  Top Layer w0.75: D60.A D59.K
NetD60_K: D60.K D61.A | length 7.2
  Top Layer w0.75: D61.A D60.K
NetD61_K: D61.K D62.A | length 7.2
  Top Layer w0.75: D62.A D61.K
NetD62_K: D62.K D63.A | length 7.2
  Top Layer w0.75: D63.A D62.K
NetD63_K: D63.K D64.A | length 7.2
  Top Layer w0.75: D64.A D63.K
NetD64_K: D64.K J2.6 | length 29
  Top Layer w0.75: J2.6 122.25,33.25 135,46 D64.K
NetD65_K: D65.K D66.A | length 7.2
  Top Layer w0.75: D66.A D65.K
NetD66_K: D66.K D67.A | length 7.2
  Top Layer w0.75: D67.A D66.K
NetD67_K: D67.K D68.A | length 7.2
  Top Layer w0.75: D68.A D67.K
NetD68_K: D68.K D69.A | length 7.2
  Top Layer w0.75: D69.A D68.K
NetD69_K: D69.K D70.A | length 7.2
  Top Layer w0.75: D70.A D69.K
NetD70_K: D70.K D71.A | length 7.2
  Top Layer w0.75: D71.A D70.K
NetD71_K: D71.K D72.A | length 7.2
  Top Layer w0.75: D72.A D71.K
NetD72_K: D72.K J2.5 | length 25.5
  Top Layer w0.75: J2.5 120.75,34 125,38.25 D72.K
NetD73_K: D73.K D74.A | length 7.2
  Top Layer w0.75: D74.A D73.K
NetD74_K: D74.K D75.A | length 7.2
  Top Layer w0.75: D75.A D74.K
NetD75_K: D75.K D76.A | length 7.2
  Top Layer w0.75: D76.A D75.K
NetD76_K: D76.K D77.A | length 7.2
  Top Layer w0.75: D77.A D76.K
NetD77_K: D77.K D78.A | length 7.2
  Top Layer w0.75: D78.A D77.K
NetD78_K: D78.K D79.A | length 7.2
  Top Layer w0.75: D79.A D78.K
NetD79_K: D79.K D80.A | length 7.2
  Top Layer w0.75: D80.A D79.K
NetD80_K: D80.K J2.4 | length 25.5
  Top Layer w0.75: D80.K 115,38.25 119.25,34 J2.4
NetD81_K: D81.K D82.A | length 7.2
  Top Layer w0.75: D82.A D81.K
NetD82_K: D82.K D83.A | length 7.2
  Top Layer w0.75: D83.A D82.K
NetD83_K: D83.K D84.A | length 7.2
  Top Layer w0.75: D84.A D83.K
NetD84_K: D84.K D85.A | length 7.2
  Top Layer w0.75: D85.A D84.K
NetD85_K: D85.K D86.A | length 7.2
  Top Layer w0.75: D86.A D85.K
NetD86_K: D86.K D87.A | length 7.2
  Top Layer w0.75: D87.A D86.K
NetD87_K: D87.K D88.A | length 7.2
  Top Layer w0.75: D88.A D87.K
NetD88_K: D88.K J2.3 | length 29
  Top Layer w0.75: D88.K 105,46 117.75,33.25 J2.3
NetD89_K: D89.K D90.A | length 7.2
  Top Layer w0.75: D90.A D89.K
NetD90_K: D90.K D91.A | length 7.2
  Top Layer w0.75: D91.A D90.K
NetD91_K: D91.K D92.A | length 7.2
  Top Layer w0.75: D92.A D91.K
NetD92_K: D92.K D93.A | length 7.2
  Top Layer w0.75: D93.A D92.K
NetD93_K: D93.K D94.A | length 7.2
  Top Layer w0.75: D94.A D93.K
NetD94_K: D94.K D95.A | length 7.2
  Top Layer w0.75: D95.A D94.K
NetD95_K: D95.K D96.A | length 7.2
  Top Layer w0.75: D96.A D95.K
NetD96_K: D96.K J2.2 | length 33.5
  Top Layer w0.75: D96.K 96.6,53.6 96.625,53.575 96.625,51.888 116.25,32.263 J2.2
NetD97_K: D97.K D98.A | length 7.2
  Top Layer w0.75: D98.A D97.K
NetD98_K: D98.K D99.A | length 7.2
  Top Layer w0.75: D99.A D98.K
NetD99_K: D99.K D100.A | length 7.2
  Top Layer w0.75: D100.A D99.K
NetD100_K: D100.K D101.A | length 7.2
  Top Layer w0.75: D101.A D100.K
NetD101_K: D101.K D102.A | length 7.2
  Top Layer w0.75: D102.A D101.K
NetD102_K: D102.K D103.A | length 7.2
  Top Layer w0.75: D103.A D102.K
NetD103_K: D103.K D104.A | length 7.2
  Top Layer w0.75: D104.A D103.K
NetD104_K: D104.K J3.7 | length 26.7
  Top Layer w0.75: J3.7 83.75,38 82,39.75 82,52.25 83.35,53.6 D104.K
NetD105_K: D105.K D106.A | length 7.2
  Top Layer w0.75: D106.A D105.K
NetD106_K: D106.K D107.A | length 7.2
  Top Layer w0.75: D107.A D106.K
NetD107_K: D107.K D108.A | length 7.2
  Top Layer w0.75: D108.A D107.K
NetD108_K: D108.K D109.A | length 7.2
  Top Layer w0.75: D109.A D108.K
NetD109_K: D109.K D110.A | length 7.2
  Top Layer w0.75: D110.A D109.K
NetD110_K: D110.K D111.A | length 7.2
  Top Layer w0.75: D111.A D110.K
NetD111_K: D111.K D112.A | length 7.2
  Top Layer w0.75: D112.A D111.K
NetD112_K: D112.K J3.6 | length 26.8
  Top Layer w0.75: D112.K 75,44.5 82.25,37.25 J3.6
NetD113_K: D113.K D114.A | length 7.2
  Top Layer w0.75: D114.A D113.K
NetD114_K: D114.K D115.A | length 7.2
  Top Layer w0.75: D115.A D114.K
NetD115_K: D115.K D116.A | length 7.2
  Top Layer w0.75: D116.A D115.K
NetD116_K: D116.K D117.A | length 7.2
  Top Layer w0.75: D117.A D116.K
NetD117_K: D117.K D118.A | length 7.2
  Top Layer w0.75: D118.A D117.K
NetD118_K: D118.K D119.A | length 7.2
  Top Layer w0.75: D119.A D118.K
NetD119_K: D119.K D120.A | length 7.2
  Top Layer w0.75: D120.A D119.K
NetD120_K: D120.K J3.5 | length 30.3
  Top Layer w0.75: D120.K 65,52.25 80.75,36.5 J3.5
NetD121_K: D121.K D122.A | length 7.2
  Top Layer w0.75: D122.A D121.K
NetD122_K: D122.K D123.A | length 7.2
  Top Layer w0.75: D123.A D122.K
NetD123_K: D123.K D124.A | length 7.2
  Top Layer w0.75: D124.A D123.K
NetD124_K: D124.K D125.A | length 7.2
  Top Layer w0.75: D125.A D124.K
NetD125_K: D125.K D126.A | length 7.2
  Top Layer w0.75: D126.A D125.K
NetD126_K: D126.K D127.A | length 7.2
  Top Layer w0.75: D127.A D126.K
NetD127_K: D127.K D128.A | length 7.2
  Top Layer w0.75: D128.A D127.K
NetD128_K: D128.K J3.4 | length 37.5
  Top Layer w0.75: D128.K 56.6,53.6 59.2,51 64,51 79.25,35.75 J3.4
NetD129_K: D129.K D130.A | length 7.2
  Top Layer w0.75: D130.A D129.K
NetD130_K: D130.K D131.A | length 7.2
  Top Layer w0.75: D131.A D130.K
NetD131_K: D131.K D132.A | length 7.2
  Top Layer w0.75: D132.A D131.K
NetD132_K: D132.K D133.A | length 7.2
  Top Layer w0.75: D133.A D132.K
NetD133_K: D133.K D134.A | length 7.2
  Top Layer w0.75: D134.A D133.K
NetD134_K: D134.K D135.A | length 7.2
  Top Layer w0.75: D135.A D134.K
NetD135_K: D135.K D136.A | length 7.2
  Top Layer w0.75: D136.A D135.K
NetD136_K: D136.K J3.3 | length 45.6
  Top Layer w0.75: D136.K 46.6,53.6 50.7,49.5 63.25,49.5 77.75,35 J3.3
NetD137_K: D137.K D138.A | length 7.2
  Top Layer w0.75: D138.A D137.K
NetD138_K: D138.K D139.A | length 7.2
  Top Layer w0.75: D139.A D138.K
NetD139_K: D139.K D140.A | length 7.2
  Top Layer w0.75: D140.A D139.K
NetD140_K: D140.K D141.A | length 7.2
  Top Layer w0.75: D141.A D140.K
NetD141_K: D141.K D142.A | length 7.2
  Top Layer w0.75: D142.A D141.K
NetD142_K: D142.K D143.A | length 7.2
  Top Layer w0.75: D143.A D142.K
NetD143_K: D143.K D144.A | length 7.2
  Top Layer w0.75: D144.A D143.K
NetD144_K: D144.K J3.2 | length 53.7
  Top Layer w0.75: D144.K 36.6,53.6 42.2,48 62.5,48 76.25,34.25 J3.2
NTC_1: C1.2 J4.2 RT1.2 | length 323.7
  Top Layer w0.25: J4.2 47.75,31.75 42.75,36.75 38.25,36.75 29.5,36.75 24,42.25 24,133.75 27.925,137.675 174.825,137.675 179.75,132.75 179.75,90.05 RT1.2
NTC_2: C2.2 J4.3 RT2.2 | length 263.2
  Top Layer w0.25: J4.3 49.25,32.25 44,37.5 29.5,37.5 24.5,42.5 24.5,133.5 28.225,137.225 114.275,137.225 119.5,132 119.5,90.05 RT2.2
NTC_3: C3.2 J4.5 RT3.2 | length 205.1
  Top Layer w0.25: J4.5 52.25,35.25 51.125,36.375 51.025,36.375 50.75,36.65 50.75,36.75 50.475,37.025 47.25,40.25 27.5,40.25 25,42.75 25,133.25 28.471,136.721 52.779,136.721 59.45,130.05 RT3.2
pads on no net: J1. J2. J3. J4.

## Silkscreen, mask and mechanical layers (free items; w line width, h text height)
Top Overlay:
  drawing of 40 lines, arcs and shapes, not listed
  text "LED Temp Sense OUT" at 38.1,31.719 h3
  text "LED Bank 3 IN" at 71.9,31.725 h3
  text "LED Bank 2 IN" at 111.9,31.725 h3
  text "LED Bank 1 IN" at 151.8,31.725 h3
  text "UV LED Array - 144 x 25mW" at 188.1,25.47 h2.5
  text "Feb 20204 - version 0" at 194.9,23.028 h2.5